# Altium PCB PCB1.PcbDoc
Units mil, origin at the board's own origin, x right, y up, seen from the top; angles counter-clockwise.
Board outline 3225 x 2370 mil, 2 copper layers (Top Layer, Bottom Layer); 84 components, 87 nets, 358 pads, 128 vias.
Unrouted connection lines stored in the file: 1.
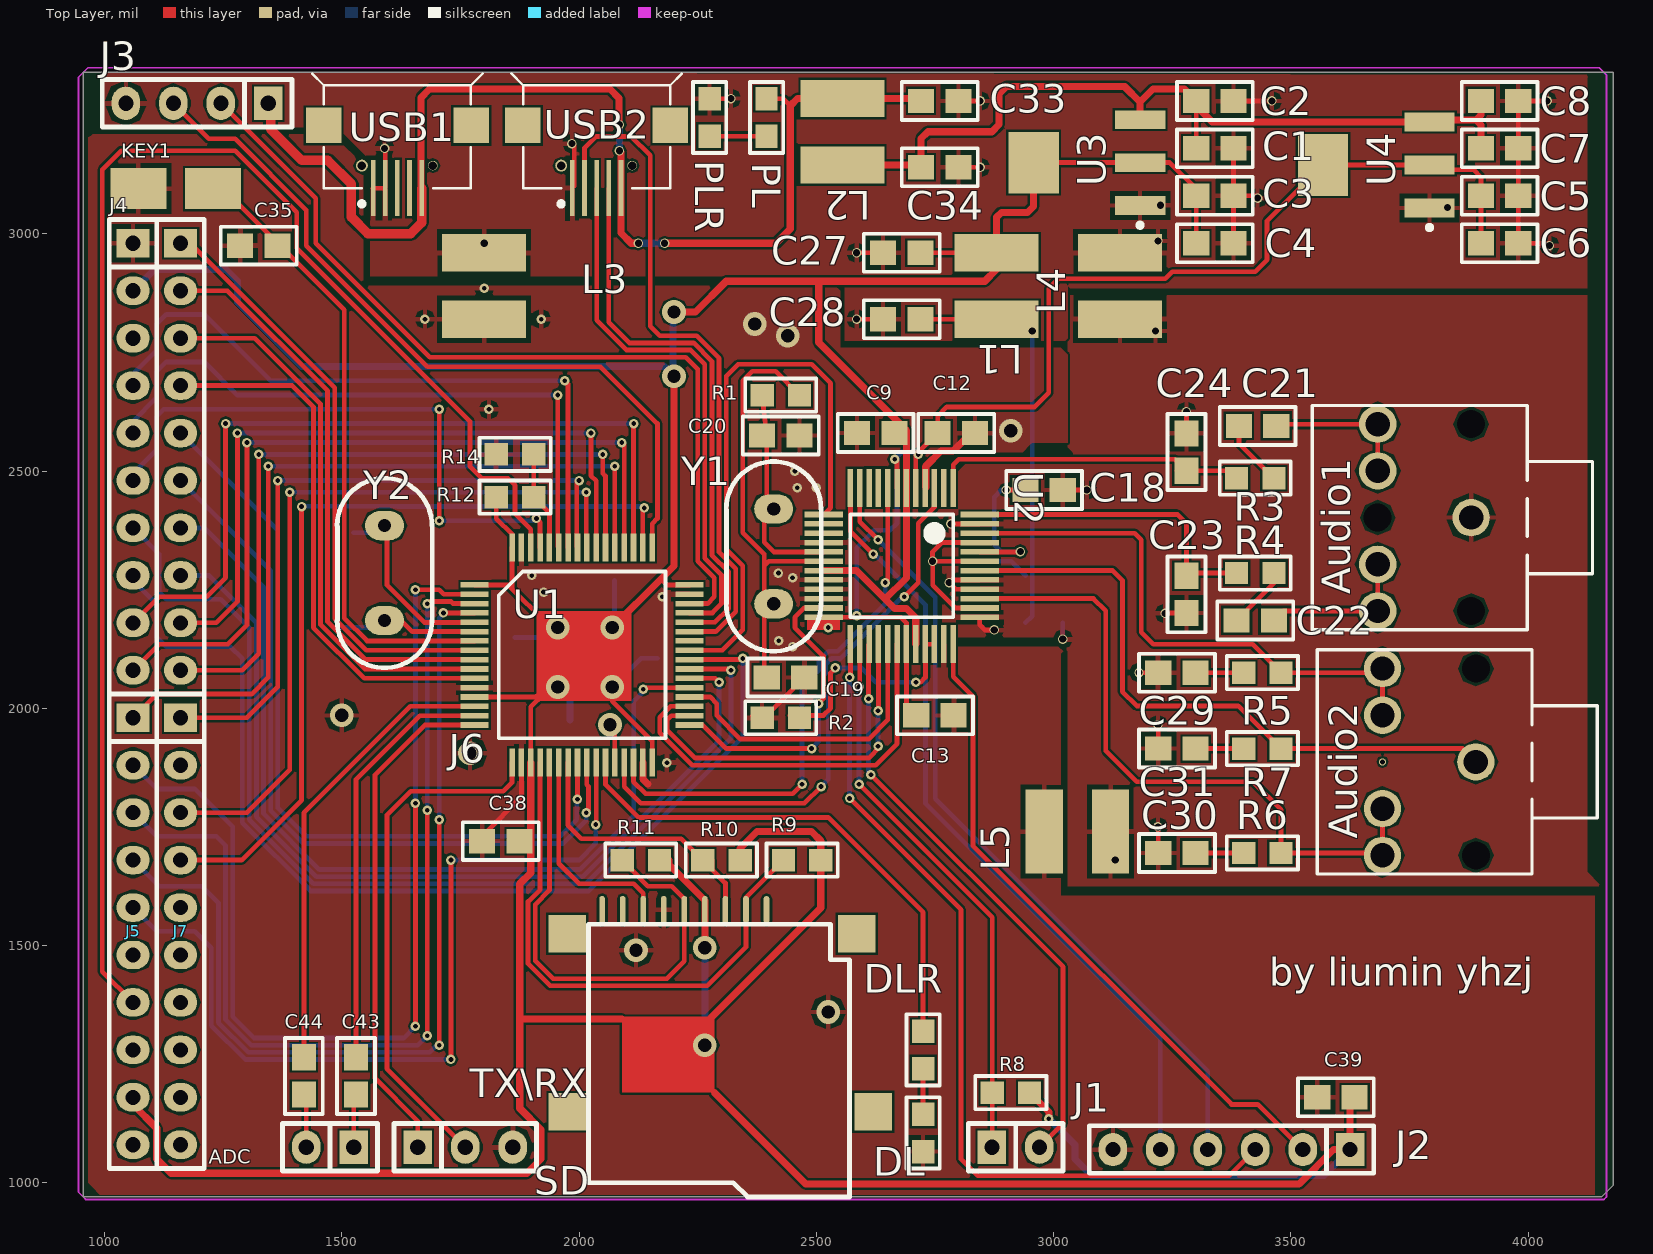
[diagram p0: Top Layer view]
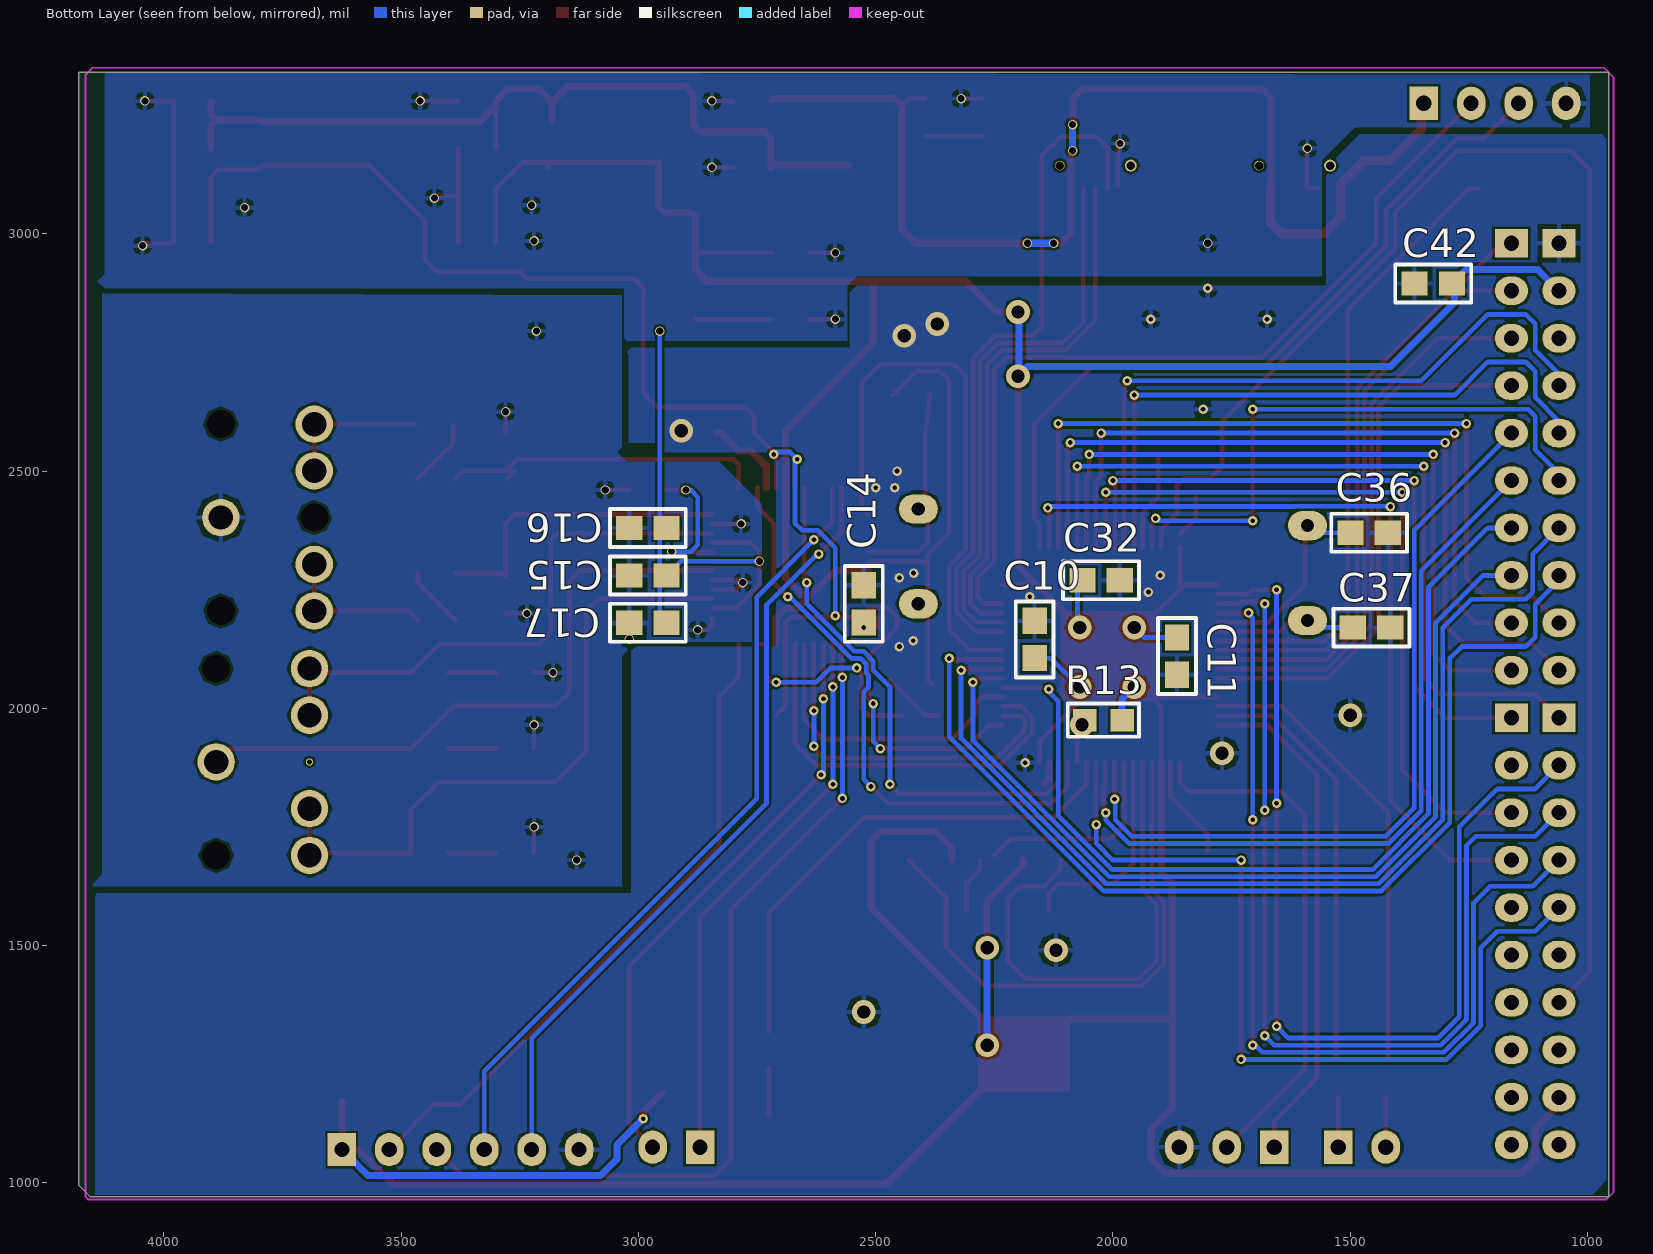
[diagram p1: Bottom Layer view, seen from below]

## Layer stack, top to bottom
Top Layer: signal copper 1.4
Dielectric: dielectric 12.6, FR-4, Dk 4.8
Bottom Layer: signal copper 1.4

## Board outline
955,3340 955,970 4155,970 4180,995 4180,3340 955,3340

## Design rules (kind name [scope] priority, off if disabled: settings)
Clearance [All] p1: gap=5
ComponentClearance [All] p1: gap=0 collisioncheckmode=3 verticalgap=10 showdistances=FALSE
PolygonConnect [All] p1: connectstyle=Relief reliefconductorwidth=10 reliefentries=4 polygonreliefangle="90 Angle"
RoutingVias [All] p1: holewidth=28 width=50 viastyle="Through Hole" minholewidth=28 minwidth=50 maxholewidth=28 maxwidth=50
SilkscreenOverComponentPads [IsPad] p1: minsilkscreentomaskgap=10
SolderMaskExpansion [All] p1: expansion=4
Width [All] p1: maxlimit=20 minlimit=10 preferedwidth=15 minimp=50.000000 maximp=50.000000 favimp=50.000000
26 further rules are at their usual default settings.

## Components (designator, comment, footprint, x,y, rotation, side; value= is the part's Value field where it differs from the comment)
ADC "CON2" SIP2 1475,1075 r180 top locked
Audio1 "Audio" AUDIO#1 3880,2205 r180 top
Audio2 "Audio" AUDIO#2 3890,1690 r180 top
C1 "106" 电容器 3340,3180 r180 top
C2 "106" 电容器 3340,3280 r180 top
C3 "106" 电容器 3340,3080 r180 top
C4 "106" 电容器 3340,2980 r180 top
C5 "106" 电容器 3940,3080 r180 top
C6 "106" 电容器 3940,2980 r180 top
C7 "106" 电容器 3940,3180 r180 top
C8 "106" 电容器 3940,3280 r180 top
C9 "104" 电容器 2625,2580 r0 top
C10 "104" 电容器 2165,2145 r270 bottom
C11 "104" 电容器 1865,2110 r90 bottom
C12 "104" 电容器 2795,2580 r180 top
C13 "104" 电容器 2750,1985 r180 top
C14 "104" 电容器 2525,2220 r270 bottom
C15 "104" 电容器 2980,2280 r180 bottom
C16 "104" 电容器 2980,2380 r180 bottom
C17 "104" 电容器 2980,2180 r180 bottom
C18 "104" 电容器 2980,2460 r0 top
C19 "22p" 电容器 2435,2065 r180 top
C20 "22p" 电容器 2425,2575 r180 top
C21 "1uf" 电容器 3430,2595 r180 top
C22 "1uf" 电容器 3425,2185 r180 top
C23 "22p" 电容器 3280,2240 r270 top
C24 "22p" 电容器 3280,2540 r90 top
C27 "106" 电容器 2680,2960 r180 top
C28 "106" 电容器 2680,2820 r180 top
C29 "10n" 电容器 3260,2075 r0 top
C30 "10n" 电容器 3260,1695 r0 top
C31 "10n" 电容器 3260,1915 r0 top
C32 "104" 电容器 2025,2270 r0 bottom
C33 "106" 电容器 2760,3280 r0 top
C34 "106" 电容器 2760,3140 r0 top
C35 "104" 电容器 1325,2975 r0 top
C36 "20p" 电容器 1460,2370 r180 bottom
C37 "20p" 电容器 1455,2170 r0 bottom
C38 "104" 电容器 1835,1720 r0 top
C39 "104" 电容器 3595,1180 r0 top
C42 "104" 电容器 1325,2895 r180 bottom
C43 "106" 电容器 1530,1225 r270 top
C44 "106" 电容器 1420,1225 r270 top
DL "R_0805" R_0805 2725,1105 r270 top
DLR "R_0805" R_0805 2725,1280 r270 top
J1 "CON2" SIP2 2920,1075 r0 top locked
J2 "CON6" SIP6 3625,1070 r180 top locked
J3 "CON4" SIP4 1195,3275 r180 top locked
J4 "CON10" sip10 1060,2980 r270 top locked
J5 "CON10" sip10 1060,1980 r270 top locked
J6 "CON10" sip10 1160,2980 r270 top locked
J7 "CON10" sip10 1160,1980 r270 top locked
KEY1 "KEY" KEY 1150,3095 r0 top
L1 "4.8u" L 2880,2960 r180 top
L2 "4.8u" L 2555,3285 r180 top
L3 "10uH" L 1800,2960 r180 top
L4 "10uH" L 3140,2960 r180 top
L5 "10uH" L 3120,1740 r90 top
PL "R_0805" R_0805 2395,3245 r270 top
PLR "R_0805" R_0805 2275,3245 r90 top
R1 "1M" R_0805 2425,2660 r0 top
R2 "100K" R_0805 2425,1980 r180 top
R3 "510" R_0805 3425,2485 r0 top
R4 "510" R_0805 3425,2285 r0 top
R5 "10" R_0805 3440,2075 r0 top
R6 "10" R_0805 3440,1695 r0 top
R7 "10" R_0805 3440,1915 r0 top
R8 "100k" R_0805 2910,1190 r0 top
R9 "10k" R_0805 2470,1680 r0 top
R10 "10k" R_0805 2300,1680 r0 top
R11 "10k" R_0805 2130,1680 r0 top
R12 "10K" R_0805 1865,2445 r0 top
R13 "10K" R_0805 2020,1975 r0 bottom
R14 "10K" R_0805 1865,2535 r0 top
SD "SD" TF卡座 2395,1575 r0 top locked
TX\RX "CON3" SIP3 1760,1075 r0 top locked
U1 "STM32f1 105 64" LQPF64_STM32 1780,2260 r0 top locked
U2 "vs1053" QFP48 2680,2300 r270 top locked
U3 "1117_3.3" SOT230P700X180-4N 3070,3150 r180 top
U4 "1117_1.8" SOT230P700X180-4N 3680,3145 r180 top
USB1 "usb" micro-USB 1600,3220 r90 top
USB2 "usb" micro-USB 2020,3220 r90 top
Y1 "Y1" XTAL 2410,2320 r90 top locked
Y2 "Y" XTAL 1590,2285 r90 top locked

## Footprints (in the part's own frame and the unit in brackets; to place one, negate y for a bottom-side part, rotate by r counter-clockwise, add the part's x,y. Pads: shape width x height; smd on the part's side, far side on the other; paste and mask are expansions set on the pad)
AUDIO#1 [mm]
  round 1 hole 1.5: 0(5,-5) 1(0,0) 2(0,-10)
  round 2 hole 1.3: 1S(0,-5) 2R(5,-10) 3N(5,-7.5) 4N(5,-2.5) 5T(5,0)
  silkscreen extent -6.5,-11 8.5,1, body extent -6.23,-11.05 8.77,1.15, height 11
AUDIO#2 [mm]
  round 0.381 hole 0.254: 0(5,-5)
  round 1 hole 1.5: 1(0,0) 2(0,-10)
  round 2 hole 1.3: 1S(0,-5) 2R(5,-10) 3N(5,-7.5) 4N(5,-2.5) 5T(5,0)
  silkscreen extent -6.5,-11 8.5,1, body extent -6.23,-11.05 8.77,1.15, height 11
KEY [mm]
  rect 3x2.2 smd: 1(-2,0) 2(2,0)
L [mm]
  rect 4.5x2 smd: 1(0,3.556) 2(0,0)
LQPF64_STM32 [mm]
  rect 1.5x0.3 smd: 1(0,0) 2(0,-0.5) 3(0,-1) 4(0,-1.5) 5(0,-2) 6(0,-2.5) 7(0,-3) 8(0,-3.5) 9(0,-4) 10(0,-4.5) 11(0,-5) 12(0,-5.5) 13(0,-6) 14(0,-6.5) 15(0,-7) 16(0,-7.5) 33(11.5,-7.5) 34(11.5,-7) 35(11.5,-6.5) 36(11.5,-6) 37(11.5,-5.5) 38(11.5,-5) 39(11.5,-4.5) 40(11.5,-4) 41(11.5,-3.5) 42(11.5,-3) 43(11.5,-2.5) 44(11.5,-2) 45(11.5,-1.5) 46(11.5,-1) 47(11.5,-0.5) 48(11.5,0)
  rect 0.3x1.5 smd: 17(2,-9.5) 18(2.5,-9.5) 19(3,-9.5) 20(3.5,-9.5) 21(4,-9.5) 22(4.5,-9.5) 23(5,-9.5) 24(5.5,-9.5) 25(6,-9.5) 26(6.5,-9.5) 27(7,-9.5) 28(7.5,-9.5) 29(8,-9.5) 30(8.5,-9.5) 31(9,-9.5) 32(9.5,-9.5) 49(9.5,2) 50(9,2) 51(8.5,2) 52(8,2) 53(7.5,2) 54(7,2) 55(6.5,2) 56(6,2) 57(5.5,2) 58(5,2) 59(4.5,2) 60(4,2) 61(3.5,2) 62(3,2) 63(2.5,2) 64(2,2)
  silkscreen extent 1.28,-8.21 10.21,0.72
micro-USB [mm]
  rect 3x0.25 smd: 1(-3.146,-1.732) 2(-3.146,-1.082) 3(-3.146,-0.432) 4(-3.146,0.218) 5(-3.146,0.868)
  round 0.635 hole 0.457 unplated: MH1(-1.938,1.468)
  round 0.508 hole 0.457 unplated: MH2(-1.938,-2.332)
  rect 1.9x1.9 smd: ""(0.212,3.518) ""(0.212,-4.382)
  silkscreen extent -4.11,-5 2.99,4.14, body extent -2.67,-4.83 2.93,3.97, height 2.74
QFP48 [mm]
  rect 2.05x0.3 smd: 1(-4.175,2.75) 2(-4.175,2.25) 3(-4.175,1.75) 4(-4.175,1.25) 5(-4.175,0.75) 6(-4.175,0.25) 7(-4.175,-0.25) 8(-4.175,-0.75) 9(-4.175,-1.25) 10(-4.175,-1.75) 11(-4.175,-2.25) 12(-4.175,-2.75) 25(4.175,-2.75) 26(4.175,-2.25) 27(4.175,-1.75) 28(4.175,-1.25) 29(4.175,-0.75) 30(4.175,-0.25) 31(4.175,0.25) 32(4.175,0.75) 33(4.175,1.25) 34(4.175,1.75) 35(4.175,2.25) 36(4.175,2.75)
  rect 0.3x2.05 smd: 13(-2.75,-4.175) 14(-2.25,-4.175) 15(-1.75,-4.175) 16(-1.25,-4.175) 17(-0.75,-4.175) 18(-0.25,-4.175) 19(0.25,-4.175) 20(0.75,-4.175) 21(1.25,-4.175) 22(1.75,-4.175) 23(2.25,-4.175) 24(2.75,-4.175) 37(2.75,4.175) 38(2.25,4.175) 39(1.75,4.175) 40(1.25,4.175) 41(0.75,4.175) 42(0.25,4.175) 43(-0.25,4.175) 44(-0.75,4.175) 45(-1.25,4.175) 46(-1.75,4.175) 47(-2.25,4.175) 48(-2.75,4.175)
  silkscreen extent -2.75,-2.75 2.75,2.75, body extent -3.5,-3.5 3.5,3.5, height 1.6
R_0805 [mm]
  rect 1.25x1.2 smd: 1(-1,0) 2(1,0)
  silkscreen extent -1.91,-0.89 1.91,0.89
SIP2 [mil]
  rect 60x70 hole 32: 1(-50,0)
  oval 60x70 hole 32: 2(50,0)
  silkscreen extent -100,-50 100,50
SIP3 [mil]
  rect 60x70 hole 32: 1(-100,0)
  oval 60x70 hole 32: 2(0,0) 3(100,0)
  silkscreen extent -150,-50 150,50
SIP4 [mil]
  rect 60x70 hole 32: 1(-150,0)
  oval 60x70 hole 32: 2(-50,0) 3(50,0) 4(150,0)
  silkscreen extent -200,-50 200,50
SIP6 [mil]
  rect 60x70 hole 32: 1(0,0)
  oval 60x70 hole 32: 2(100,0) 3(200,0) 4(300,0) 5(400,0) 6(500,0)
  silkscreen extent -50,-50 550,50
sip10 [mil]
  rect 60x70 hole 32: 1(0,0)
  oval 60x70 hole 32: 2(100,0) 3(200,0) 4(300,0) 5(400,0) 6(500,0) 7(600,0) 8(700,0) 9(800,0) 10(900,0)
  silkscreen extent -50,-50 950,50
SOT230P700X180-4N [mm] "SOT223, 4-Leads, Body 6.7x7.3mm (max), Pitch 2.30mm, IPC Medium Density"
  rect 2.7x1 smd: 1(-2.85,2.3) 2(-2.85,0) 3(-2.85,-2.3)
  rect 2.7x3.3 smd: 2(2.85,0)
  silkscreen extent -2.98,3.23 -2.73,3.47, body extent -1.85,-3.35 1.85,3.35, height 1.8
TF卡座 [mm]
  rect 2x2 smd: 0(-10.668,-10.795) 0(-10.668,-1.27) 0(4.826,-1.27) 0(5.715,-10.795)
  oval 0.3x1.5 smd: 1(0,0) 2(-1.1,0) 3(-2.2,0) 4(-3.3,0) 5(-4.4,0) 6(-5.5,0) 7(-6.6,0) 8(-7.7,0) 9(-8.8,0)
  silkscreen extent -9.53,-15.37 4.44,-0.76, body extent -10.79,-15.24 5.71,0.13, height 2
XTAL [mil]
  round 0 all layers, no hole: 0(0,0)
  oval 62x82 hole 28: 1(-100,0) 2(100,0)
  silkscreen extent -200,-100 200,100
电容器 [mm]
  rect 1.4x1.3 smd: 1(-1,0) 2(1,0)
  silkscreen extent -2.03,-1.02 2.03,1.02

## Part data
C1 C2 C3 C4 C5 C6 C7 C8 C9 C10 C11 C12 C13 C14 C15 C16 C17 C18 C19 C20 C21 C22 C23 C24 C27 C28 C29 C30 C31 C32 C33 C34 C35 C36 C37 C38 C39 C42 C43 C44: library part cpp
L1 L2 L3 L4 L5: library part L
R1 R2 R3 R4 R5 R6 R7 R8 R9 R10 R11 R12 R13 R14: library part R_0805
SD: library part TF卡座
U1: library part "STM32f1 103 64"
U3 U4: library part 1117
USB1 USB2: library part CON4
Y1 Y2: library part XTAL, "Crystal Oscillator"

## Via types
v1: diameter 20, hole 10, Top Layer to Bottom Layer, 68 vias
v2: diameter 20, hole 15, Top Layer to Bottom Layer, 35 vias
v3: diameter 50, hole 28, Top Layer to Bottom Layer, 16 vias
v4: diameter 20, hole 10, Top Layer to Bottom Layer, tented bottom, 9 vias

## Nets (pads, with @x,y where several pads share a name; then routed paths per layer and width w, separated by ;. In a path a pad name is that pad's centre, name@x,y a point inside that pad or via, vN(x,y) a via of type N, cw(c..) or ccw(c..) an arc to the next point about the centre after c; other vN are vias at no path point)
1.8V: C5.2 C6.2 C12.2 C13.2 C14.2 U2.5 U2.7 U2.24 U2.31 U4.2 | length 2747.9
  Top Layer w10: U2.24 2678.27,2191.73 2689.84,2180.16 U2.31 2689.84,2005.79 C13.2 ; v1(2665.08,2524.92) 2670.16,2519.84 U2.7 ; U2.5 2709.53,2533.9 C12.2 2755.63,2615.63 2775,2635 2960,2635 2990,2665 2990,2885 3010,2905 3235,2905 3250,2920 3425,2920 3450,2945 3450,3027.2 3567.8,3145 3792.2,3145 3802.2,3135 3885,3135 3900.63,3119.37 C5.2 C6.2
  Bottom Layer w10: v1(2585,2195) 2585,2338.28 2621.72,2375 2655,2375 2670,2390 2670,2529.84 2680.16,2540 2710,2540 v1(2715,2535)
  other v1: 2525,2170
3.3V: C3.2 C4.2 C9.2 C10.2 C11.2 C27.1 C32.2 C38.2 C39.2 C42.2 J2.1 J4.2 J5.9 L1.2 R8.2 R9.2 R10.2 R11.2 R12.1 R13.1 SD.4 U1.1 U1.13 U1.19 U1.32 U1.48 U1.64 U2.6 U2.14 U2.19 U2.32 U3.2 | length 11709.5
  Top Layer w10: J5.9@1060,1165 J5.9 ; U1.13 1908.78,2023.78 1915,2030 ; U1.1 1850,2260 1858.74,2251.26 ; R12.1 1825.63,2399.37 U1.64@1858.74,2366.26 ; U1.64 1858.74,2251.26 ; U1.19 1898.11,2003.11 1925,2030 ; 1925,2180 1925,2185 1858.74,2251.26 ; v3@2070,2055 v3(2070,2045) 2070,2015 2154.02,1930.98 U1.32 ; 2172.5,2272.5 2185,2260 U1.48 ; C27.1 L1.2 ; U3.2@2957.8,3150 U3.2@3182.2,3150 ; U3.2@3192.83,3139.37 U3.2@3182.2,3150 ; C4.2 C3.2 3300.63,3094.37 3245,3150 U3.2@3182.2,3150
  Top Layer w15: J5.9@1060,1165 1110,1115 1110,1050 1140,1020 1890,1020 1920,1050 1920,1112.12 1875,1157.12 1875,1630 1898.11,1653.11 U1.19 ; 1875,1345 2090,1345 ; 2000,2100 v3(2070,2170) 2172.5,2272.5 2200,2300 v3(2200,2700) ; R11.2@2189.37,1680 2189.37,1670.63 2265.08,1594.92 SD.4 v3@2265.08,1510.08 ; v3(2200,2835) 2245,2835 2310,2900 2505,2900 ; 2225,1295 2509.37,1579.37 R9.2 2509.37,1720.63 2490,1740 2375,1740 2339.37,1704.37 R10.2 ; 2285,1190 2477.5,997.5 3517.6,997.5 3590.1,1070 J2.1 C39.2@3625,1170.63 ; U2.19 2584.84,2290.16 2645,2230 ; U2.32 2709.53,2190.47 2690,2210 2665,2210 2645,2230 ; R8.2 2990,1149.37 v1(2990,1135) ; U3.2@2957.8,3150 2957.8,3057.8 2945,3045 2890,3045 2880,3035 L1.2 2880,2925 2855,2900 2505,2900 ; 2505,2900 2505,2770.63 2689.84,2585.79 U2.6 2689.84,2274.84 2645,2230
  Bottom Layer w10: C11.2 1934.37,2149.37 v3(1955,2170) ; v3(2070,2045) 2130.63,2105.63 C10.2 ; v3@2074.37,2174.37 C32.2@2074.37,2270
  Bottom Layer w15: J4.2 1105,2925 1255.63,2925 1280,2900.63 1280,2855 1415,2720 2180,2720 v3@2197.5,2702.5 ; v3(1955,2045) 1980.63,2019.37 R13.1 ; v3(2200,2700) v3@2197.5,2702.5 ; v3(2200,2835) 2197.5,2832.5 v3@2197.5,2702.5 ; v3(2265,1290) v3(2265,1495) ; v1(2990,1135) 3045,1080 3045,1050 3080,1015 3570,1015 J2.1
5V: C33.1 J3.1 L2.2 PL.1 USB1.1 USB2.1 | length 2478.3
  Top Layer w10: USB1.1@1664.3,3100.03 1666.8,3097.53 USB1.1 ; PL.1 2430.63,3284.37 2445,3270 ; C33.1@2715.63,3285 C33.1
  Top Layer w15: USB1.1@1666.8,3097.53 1666.8,3286.8 1685,3305 2065,3305 2084.3,3285.7 v2@2084.3,3230.7 ; v2(2085,3175) 2088.18,3171.82 USB2.1 2088.18,3001.82 2110,2980 v2(2125,2980) ; v2(2180,2980) 2415,2980 2445,3010 2445,3270 2460,3285 L2.2 C33.1@2715.63,3285
  Top Layer w20: J3.1@1350,3275 1350,3220 1415,3155 1470,3155 1520,3105 1520,3035 1555,3000 1645,3000 1668.18,3023.18 USB1.1
  Bottom Layer w15: v2(2085,3175) v2(2085,3230) ; v2(2125,2980) v2(2180,2980)
5V_IN: C1.2 C2.2 C7.2 C8.2 C34.1 L2.1 U3.3 U4.3 | length 1777.9
  Top Layer w10: C34.1@2715.63,3145 C34.1 ; C1.2 3300.63,3269.37 C2.2 ; U4.3 U4.3@3796.65,3240
  Top Layer w15: L2.1 C34.1@2715.63,3145 ; C34.1 2720.63,3200.63 2735,3215 2870,3215 2885,3230 2885,3295 2900,3310 3150,3310 3182.2,3277.8 ; U3.3 3182.2,3277.8 ; C2.2@3300.63,3269.37 3334.45,3235.55 U4.3 ; C2.2 3275.63,3305 3209.41,3305 3182.2,3277.8 ; U4.3@3796.65,3240 3890,3240 ; C7.2 3900.63,3229.37 3890,3240 ; C8.2 3900.63,3250.63 3890,3240
ADC1: C44.1 U1.14 | length 968.5
  Top Layer w10: C44.1 1420,1780 1644.09,2004.09 U1.14
ADC2: C43.1 U1.15 | length 886.3
  Top Layer w10: C43.1@1530,1269.37 1530,1850 1664.41,1984.41 U1.15
AGND: Audio1.1S C15.1 C16.1 C17.1 C18.2 C23.2 C24.2 C29.1 C30.1 C31.1 L4.1 L5.2 U2.37 U2.40 U2.41 U2.47 | length 570.9
  Top Layer w10: v2(2783.58,2388.58) U2.47 ; U2.37 2844.37,2175.63 2855,2165 v2(2875,2165) ; U2.40 2794.21,2250.79 v2(2780,2265) 2785.47,2270.47 U2.41 ; C18.2 v2(3070,2460) ; v2(3180,2075) C29.1 ; v2(3220,1750) 3220.63,1749.37 C30.1 ; v2(3220,1965) 3220.63,1964.37 C31.1 ; v2(3235,2200) 3235.63,2200.63 C23.2 ; C24.2 v2(3280,2625)
  Bottom Layer w10: v2(3019.37,2145.63) C17.1
  other v2: 3130,1680 3215,2795
AVDD: C15.2 C16.2 C17.2 C28.1 L1.1 U2.38 U2.43 U2.45 | length 1385.7
  Top Layer w10: C28.1 L1.1 ; U2.38 2793.23,2211.42 2745.16,2259.49 v2(2745.16,2309.84) ; U2.43 v2(2745.16,2309.84) ; U2.45 2764.21,2349.21 2745,2330 2745,2310 v2(2745.16,2309.84)
  Bottom Layer w10: v2(2745.16,2309.84) 2910.79,2309.84 C15.2 ; C17.2 2955,2194.37 v2(2955,2795)
BOOT0: R12.2 R14.2 U1.60 | length 210
  Top Layer w10: R14.2 R12.2 1937.48,2411.89 U1.60
BOOT1: R13.2 U1.28 | length 83.3
  Top Layer w10: v3(2065,1965) 2075.28,1954.72 U1.28
CLK: R11.1 SD.5 U1.21 | length 1064.5
  Top Layer w10: U1.21 1937.48,1616.27 1907.5,1586.29 1907.5,1467.5 1945,1430 2185,1430 2221.77,1466.77 SD.5 2221.77,1598.23 2195,1625 2145,1625 2110.63,1659.37 R11.1@2110.63,1680
CS: R9.1 SD.2 U1.20 | length 1163.4
  Top Layer w10: U1.20 1917.8,1617.8 1892.5,1592.5 1892.5,1461.29 1938.79,1415 2270,1415 2351.69,1496.69 SD.2 2351.69,1601.06 R9.1
DAT_LED: DLR.1 U1.27 | length 1078.2
  Top Layer w10: U1.27 2055.59,1839.41 2125,1770 2525,1770 2725,1570 DLR.1
DB0: J6.1 U1.8 | length 1260
  Top Layer w10: J6.1 1180,2980 1485,2675 1485,2188.79 1551.27,2122.52 1717.8,2122.52 ; 1717.8,2122.2 U1.8
DB1: J6.2 U1.9 | length 1226.9
  Top Layer w10: J6.2 1258.79,2880 1470,2668.79 1470,2182.57 1550.05,2102.52 U1.9
DB2: J6.3 U1.10 | length 1181.1
  Top Layer w10: J6.3 1316.21,2780 1455,2641.21 1455,2176.36 1548.53,2082.84 U1.10
DB3: J6.4 U1.11 | length 1147.8
  Top Layer w10: J6.4 1395,2680 1440,2635 1440,2170.15 1547,2063.15 U1.11
DB4: J6.5 U1.24 | length 1668.8
  Top Layer w10: v4(1996.54,1808.46) U1.24
  Bottom Layer w10: J6.5 1365,2375 1365,1790 1425,1730 1960,1730 1995,1765 1995,1800 2000,1805 v4(1996.54,1808.46)
DB5: J6.6 U1.25 | length 1614.4
  Top Layer w10: v4(2015,1780) 2020,1785 2020,1835 2016.22,1838.78 U1.25
  Bottom Layer w10: J6.6 1350,2290 1350,1783.79 1418.79,1715 1966.21,1715 2015,1763.79 v4(2015,1780)
DB6: J6.7 U1.37 | length 1943.8
  Top Layer w10: v1@2138.47,2043.46 U1.37
  Bottom Layer w10: J6.7 1210,2380 1335,2255 1335,1777.57 1452.57,1660 2001.21,1660 2115,1773.79 2115,2015 v1@2135,2035
  other v1: 2135,2040
DB7: J6.8 U1.38 | length 1944.6
  Top Layer w10: U1.38 2286.85,2063.15 v1(2295,2055)
  Bottom Layer w10: J6.8 1220,2280 1320,2180 1320,1771.36 1446.36,1645 2007.43,1645 2295,1932.57 v1(2295,2055)
DB8: J4.7 U1.39 | length 2213.6
  Top Layer w10: U1.39 2317.16,2082.84 v1(2320,2080)
  Bottom Layer w10: J4.7 1115,2325 1115,2245 1130,2230 1245,2230 1305,2170 1305,1765.15 1440.15,1630 2013.64,1630 2320,1936.36 v1(2320,2080)
DB9: J4.8 U1.40 | length 2222.8
  Top Layer w10: U1.40 2342.52,2102.52 v1(2345,2105)
  Bottom Layer w10: J4.8 1060,2268.79 1110,2218.79 1110,2150 1130,2130 1265,2130 1290,2105 1290,1758.93 1433.93,1615 2019.85,1615 2345,1940.15 v1(2345,2105)
DB10: J4.9 U1.51 | length 1665.3
  Top Layer w10: J4.9 1115,2235 1215,2235 1255,2275 v1@1255,2595 ; U1.51 2114.65,2589.65
  Bottom Layer w10: v1(1255,2600) v1(2115,2600)
DB11: J4.10 U1.52 | length 1672.7
  Top Layer w10: J4.10 1115,2135 1260,2135 1300,2175 v1@1300,2555 ; v1(2090,2560) 2095,2555 2095,2338.78 U1.52
  Bottom Layer w10: v1(1300,2560) v1(2090,2560)
DB12: J5.1 U1.53 | length 1666.6
  Top Layer w10: J5.1 1110,2030 1310,2030 1345,2065 v1(1345,2510) ; v1(2075,2510) 2075,2339.02 U1.53
  Bottom Layer w10: v1(1345,2510) v1(2075,2510)
DB13: J5.2 U1.2 | length 2126.9
  Top Layer w10: v1(1655,1330) v4(1655,1800) ; v1(1655,2250) 1705,2250 1714.68,2240.32 U1.2
  Bottom Layer w10: J5.2 1110,1830 1190,1830 1270,1750 1270,1350 1315,1305 1630,1305 v1(1655,1330) ; v4(1655,1800) v1(1655,2250)
DB14: J5.3 U1.3 | length 2059.7
  Top Layer w10: v4(1680,1310) v4(1680,1785) ; v1(1680,2220) 1685,2225 1730,2225 1734.37,2220.63 U1.3
  Bottom Layer w10: J5.3 1110,1730 1235,1730 1255,1710 1255,1343.79 1308.79,1290 1660,1290 v4(1680,1310) ; v4@1680,1790 v1(1680,2220) v1@1680,2225
DB15: J5.4 U1.4 | length 1952.7
  Top Layer w10: v4(1705,1290) v4(1705,1765) ; v1@1710,2205 v1(1714.06,2200.95) U1.4
  Bottom Layer w10: J5.4 1115,1625 1205,1625 1240,1590 1240,1337.57 1302.57,1275 1685,1275 1700,1290 v4(1705,1290) ; v4(1705,1765) 1705,2190 v1@1715,2200
DGND: C9.1 C10.1 C11.1 C12.1 C13.1 C14.1 C19.1 C20.1 C32.1 C35.1 C36.2 C37.1 C38.1 C39.1 C42.1 DL.2 J2.6 J4.1 KEY1.1 L3.1 L5.1 R2.2 R14.1 SD.6 TX\RX.3 U1.12 U1.18 U1.31 U1.47 U1.63 U2.4 U2.16 U2.20 U2.21 U2.22 U2.35 | length 581.5
  Top Layer w10: C38.1@1800,1700 1800,1735 1878.43,1813.43 U1.18 ; R2.2@2365.63,1985 2395,1985 C19.1@2470,2060
  Top Layer w15: U1.31 2134.33,1850.67 2145,1840 ; U2.4@2730.49,2465.65 2730.49,2509.9 2762.5,2541.91 2788.37,2541.91 2826.46,2580 C12.1
  other v1: 2185,1885 2450,2130 2420.82,2142.35 2175,2235 1925,2245 2450,2275 1900,2280 2420,2285 2460,2465 2500,2465 2455,2500 1810,2630 1675,2820 1920,2820 1800,2885
  other v3: 2525,1360 2120,1490 1770,1905 1500,1985 2910,2585 2440,2785 2370,2810
LRCK: J2.2 U2.36 | length 1403
  Top Layer w10: U2.36 2788.27,2066.73 2830,2025 2830,1710 3375,1165 3430,1165 J2.2
MCLK: J2.3 U2.25 | length 1835.2
  Top Layer w10: v1(2570,1810) 2805,1575 2805,1050 2840,1015 3370,1015 J2.3 ; v1@2571.73,2065 U2.25
  Bottom Layer w10: v1@2570,1815 v1(2570,2065)
MISO: SD.7 U1.22 | length 452.1
  Top Layer w10: U1.22 1957.17,1672.83 2000,1630 2115,1630 2135.16,1609.84 SD.7
MOSI: R10.1 SD.3 U1.23 | length 548.9
  Top Layer w10: U1.23 1976.54,1885.67 1976.54,1753.46 2005,1725 2215,1725 R10.1@2250,1690 ; R10.1@2280.63,1680 2280.63,1659.37 2308.39,1631.61 SD.3
NetADC_1: ADC.1 C43.2 | length 110.6
  Top Layer w10: ADC.1@1525,1070 C43.2@1525,1180.63
NetADC_2: ADC.2 C44.2 | length 110.6
  Top Layer w10: ADC.2@1425,1070 C44.2@1425,1180.63
NetAudio1_2R: Audio1.2R Audio1.3N C21.1 | length 308.5
  Top Layer w10: C21.1@3473.07,2598.7 Audio1.2R Audio1.3N
NetAudio1_4N: Audio1.4N Audio1.5T C22.1 | length 325.5
  Top Layer w10: C22.1 3484.37,2205 Audio1.5T Audio1.4N
NetAudio2_1S: Audio2.1S R7.2 U2.42 | length 1350.3
  Top Layer w10: U2.42 3124.84,2290.16 3145,2270 3145,2035 3175,2005 3389.37,2005 R7.2 3861.85,1915 Audio2.1S
NetAudio2_2R: Audio2.2R Audio2.3N R5.2 U2.46 | length 1174.5
  Top Layer w10: U2.46 3171.1,2368.9 3185,2355 3185,2160 3210,2135 3419.37,2135 R5.2 Audio2.2R@3684.45,2075 ; Audio2.3N Audio2.2R
NetAudio2_4N: Audio2.4N Audio2.5T R6.2 U2.39 | length 1397.2
  Top Layer w10: U2.39 3083.9,2231.1 3110,2205 3110,1910 3175,1845 3420,1845 3479.37,1785.63 R6.2 3688.15,1695 Audio2.5T Audio2.4N
NetC18_1: C18.1 U2.44 | length 318.9
  Top Layer w10: U2.44 2929.53,2329.53 v2(2930,2330) ; v2(2900,2460) C18.1
  Bottom Layer w10: v2(2900,2460) 2890,2460 2875,2445 2875,2345 2890,2330 v2(2930,2330)
NetC19_2: C19.2 R1.2 U2.18 Y1.1 | length 940.4
  Top Layer w10: C19.2@2380.32,2050.32 2390,2060 2390,2325 2345,2370 2345,2690 2365,2710 2414.37,2710 R1.2 ; 2390,2300 2399.84,2309.84 U2.18
NetC20_2: C20.2 R1.1 U2.17 Y1.2 | length 440.3
  Top Layer w10: R1.1 2395.63,2575 Y1.2@2395.63,2429.37 ; Y1.2@2390,2425 2390,2350 2410.47,2329.53 U2.17
NetC21_2: C21.2 R3.2 | length 140.5
  Top Layer w10: C21.2 3390.63,2558.74 R3.2
NetC22_2: C22.2 R4.2 | length 132.6
  Top Layer w10: C22.2 3464.37,2263.74 R4.2
NetC23_1: C23.1 R4.1 U2.48 | length 661.8
  Top Layer w10: U2.48 3261.73,2408.27 3280,2390 C23.1 3285.63,2285 R4.1
NetC24_1: C24.1 R3.1 U2.1 | length 700.4
  Top Layer w10: U2.1 2788.27,2513.27 2800,2525 3255.63,2525 C24.1 ; C24.1@3260,2500.63 C24.1@3275.63,2485 ; C24.1@3269.37,2500.63 C24.1 ; R3.1 3370,2500.63 C24.1
NetC29_2: C29.2 R5.1 | length 101.3
  Top Layer w10: C29.2 R5.1
NetC30_2: C30.2 R6.1 | length 101.3
  Top Layer w10: C30.2 R6.1
NetC31_2: C31.2 R7.1 | length 101.3
  Top Layer w10: C31.2 R7.1
NetDL_1: DL.1 DLR.2 | length 96.3
  Top Layer w10: DL.1 DLR.2
NetPL_2: PL.2 PLR.1 | length 120
  Top Layer w10: PLR.1 PL.2
NetR2_1: R2.1 U2.33 U2.34 | length 475.5
  Top Layer w10: R2.1@2444.37,1985 2515,1985 2530,2000 2530,2075 v1(2540,2085) ; v1(2710,2055) 2720,2055 2730,2065 2730,2134.84 U2.34@2748.11,2134.84
  Bottom Layer w10: v1(2540,2085) 2595,2085 2625,2055 v1(2710,2055)
NRST: C35.2 KEY1.2 U1.7 | length 1326.8
  Top Layer w10: KEY1.2 1250,3095 1505,2840 1505,2190 1553.11,2141.89 U1.7
OTG_DM: U1.44 USB2.2 | length 1163.9
  Top Layer w10: USB2.2 2062.59,2813.62 2106.21,2770 2241.21,2770 2280,2731.21 2280,2322.43 2315,2287.43 2315,2210 2286.26,2181.26 U1.44
OTG_DP: U1.45 USB2.3 | length 1139.3
  Top Layer w10: USB2.3 2037,2818 2100,2755 2235,2755 2265,2725 2265,2316.21 2300,2281.21 2300,2220 2280.95,2200.95 U1.45
OTG_ID: U1.43 USB2.4 | length 1446
  Top Layer w10: USB2.4 2011.41,3181.41 2035,3205 2110,3205 2150,3165 2150,2805 2170,2785 2247.43,2785 2295,2737.43 2295,2328.64 2330,2293.64 2330,2203.79 2287.79,2161.57 U1.43
OTG_VBUS: U1.42
P_CS: J5.5 U1.26 | length 1803
  Top Layer w10: v4(1730,1260) v4(1730,1680) ; v1(2035,1755) v1@2035,1760 ; v1@2035.91,1760.91 U1.26
  Bottom Layer w10: J5.5 1110,1530 1190,1530 1225,1495 1225,1331.36 1296.36,1260 v4@1725,1260 ; v4(1730,1680) 2000,1680 2035,1715 v1@2035,1750 ; v1(2035,1755) v1@2035,1760
P_RD: J4.6 U1.61 | length 1263.5
  Top Layer w10: v1(1705,2395) v1(1705,2630) ; v1(1910,2400) 1917.8,2392.2 U1.61
  Bottom Layer w10: J4.6 1060,2495 1110,2545 1110,2615 1125,2630 v1(1705,2630) ; v1(1705,2395) 1905,2395 v1(1910,2400)
P_REST: J5.7 U1.62 | length 3205.6
  Top Layer w10: J5.7 995,1445 995,3135.24 1035,3175.24 1035,3175 1275,3175 1405,3045 1405,2970 1770,2605 1770,2510 1795,2485 1850,2485 1865,2470 1865,2410 1898.11,2376.89 U1.62
P_RS: J4.4 U1.58 | length 1431.1
  Top Layer w10: v1(1970,2690) 1976.85,2683.15 U1.58
  Bottom Layer w10: J4.4 1060,2705 1110,2755 1110,2810 1130,2830 1210,2830 1350,2690 v1(1970,2690)
P_WR: J4.5 U1.59 | length 1370.1
  Top Layer w10: v1(1955,2660) 1955,2665 1955,2340.91 U1.59
  Bottom Layer w10: J4.5 1060,2605 1110,2655 1110,2710 1130,2730 1210,2730 1280,2660 v1(1955,2660) v1@1955,2665
PGND: C1.1 C2.1 C3.1 C4.1 C5.1 C6.1 C7.1 C8.1 C27.2 C28.2 C33.2 C34.2 J3.4 L3.2 L4.2 PLR.2 U3.1 U4.1 USB1.4 USB1.5 USB2.5 | length 1197.2
  Top Layer w10: USB1.5 USB1.4 1591.41,3178.59 v2(1590,3180) ; v2(1985,3190) 1989.7,3185.3 USB2.5@1989.7,3100.03 ; PLR.2 2319.37,3284.37 v2(2320,3285) ; v2(2585,2820) C28.2 ; v2(2585,2960) C27.2 ; C34.2 v2(2845,3140) ; C33.2 v2(2845,3280) ; C4.1 C3.1 ; C1.1 C3.1 ; C2.1 v2(3460,3280) ; v2@3425,3080 C3.1 ; v2@4040,2980 C6.1 C5.1 C7.1 C8.1 v2(4040,3280)
  other v2: 4045,2975 1800,2980 3220,2985 3830,3055 3225,3060 3430,3075
RX: J1.1 R8.1 U2.26 | length 1182.1
  Top Layer w10: v1(2590,1840) 2870.63,1559.37 R8.1 2870.63,1075.63 J1.1 ; v1@2591.42,2045 U2.26
  Bottom Layer w10: v1@2590,1835 v1(2590,1840) v1(2590,2045)
SCLK: J2.4 U2.11 | length 1698.2
  Top Layer w10: U2.11 2591.42,2393.58 v1(2630,2355)
  Bottom Layer w10: v1(2630,2355) 2750.61,2234.39 2750.61,1809.39 3325,1235 J2.4
SDIN: J2.5 U2.12 | length 1666.9
  Top Layer w10: U2.12 2571.73,2373.27 v1(2620,2325)
  Bottom Layer w10: v1(2620,2325) 2623.28,2325 2730,2218.28 2730,1800 3225,1305 J2.5
STM_RX: TX\RX.2 U1.17 | length 1102.8
  Top Layer w10: TX\RX.2 1595,1240 1595,1775 1645,1825 1840,1825 1858.74,1843.74 U1.17
STM_TX: TX\RX.1 U1.16 | length 1075.7
  Top Layer w10: TX\RX.1 1660,1130 1570,1220 1570,1860 1674.72,1964.72 U1.16
SWCLK: J3.2 U1.46 | length 1845.3
  Top Layer w10: J3.2 1445,3075 1445,2980 1685,2740 2225,2740 2250,2715 2250,2310 2285,2275 2285,2235 2270.63,2220.63 U1.46
SWDIO: J3.3 U1.49 | length 1609.3
  Top Layer w10: J3.3 1220,3200 1275,3200 1425,3050 1425,2975 1680,2720 2045,2720 2165,2600 2165,2400 2154.02,2389.02 U1.49
T_CLK: J6.9 U1.55 | length 1479.4
  Top Layer w10: J6.9 1235,2180 1280,2225 v1(1280,2580) ; v1(2025,2580) 2025,2490 2035.91,2479.09 U1.55
  Bottom Layer w10: v1(1280,2580) v1@2020,2580
T_CS: J6.10 U1.54 | length 1518.1
  Top Layer w10: J6.10 1290,2080 1325,2115 v1@1325,2530 ; v1(2050,2535) 2050,2495 2055.59,2489.41 U1.54
  Bottom Layer w10: v1(1325,2535) v1(2050,2535)
T_DIN: J7.1 U1.57 | length 1438.8
  Top Layer w10: J7.1 1300,1980 1365,2045 v1(1365,2480) ; v1@1995,2480 1995,2340.28 U1.57
  Bottom Layer w10: v1(1365,2480) v1@1995,2480
  other v1: 2000,2480
T_DO: J7.3 U1.56 | length 1594
  Top Layer w10: J7.3 1300,1780 1390,1870 v1(1390,2455) ; v1(2015,2455) 2015,2339.96 U1.56
  Bottom Layer w10: v1(1390,2455) v1(2015,2455)
T_IRQ: J7.4 U1.50 | length 1740.5
  Top Layer w10: J7.4 1288.79,1680 1415,1806.21 v1(1415,2425) ; U1.50 2134.33,2419.33 v1(2137.17,2422.17)
  Bottom Layer w10: v1(1415,2425) 1416,2426 1616.98,2426 1617.98,2425 2140,2425 v1(2137.17,2422.17)
TX: J1.2 U2.27 | length 1249.6
  Top Layer w10: v1(2610,2020) 2610,2134.53 U2.27 ; v1(2615,1860) 3020,1455 3020,1125 J1.2
  Bottom Layer w10: v1@2610,1860 v1(2610,2020)
VS_DREQ: U1.30 U2.8 | length 1125.3
  Top Layer w10: U1.30 2114.65,1845.35 2140,1820 2450,1820 v1(2470,1840) ; v1(2645,2265) 2650.47,2270.47 U2.8
  Bottom Layer w10: v1(2470,1840) 2470,2045 2505,2080 2505,2099.5 2525.5,2120 2545,2120 2645,2220 v1(2645,2265)
VS_MISO: U1.35 U2.30 | length 862.5
  Top Layer w10: U1.35 2192.88,2004.1 2170,1981.21 2170,1948.79 2238.79,1880 2625,1880 2670.16,1925.16 U2.30
VS_MOSI: U1.36 U2.29 | length 646.1
  Top Layer w10: U1.36 2276.22,2023.78 2290,2010 2290,1985 2340,1935 2610,1935 2650.47,1975.47 U2.29
VS_RST: U1.29 U2.3 | length 1245.4
  Top Layer w10: U1.29 2094.96,1835.04 2130,1800 2475,1800 v1(2510,1835) ; v1(2685,2235) 2715,2265 2715,2390 2739.02,2414.02 2739.26,2414.02 2748.9,2423.65 U2.3
  Bottom Layer w10: v1(2510,1835) 2525,1850 2525,2035 2515,2045 2515,2068.79 2520,2073.79 2520,2093.28 2531.72,2105 2551.21,2105 2681.21,2235 v1(2685,2235)
VS_SCK: U1.34 U2.28 | length 776.7
  Top Layer w10: U1.34 2194.41,1984.41 2185,1975 2185,1955 2245,1895 2610,1895 2635,1920 v1(2630,1920) ; v1@2630.79,1995.79 U2.28
  Bottom Layer w10: v1(2630,1920) v1(2630,1995)
VS_XCS: U1.33 U2.23 | length 658.4
  Top Layer w10: U1.33 2260.28,1964.72 2310,1915 v1(2490,1915) ; v1(2505,2010) 2515,2020 2515,2110 2455,2170 2455,2191.5 2474.91,2211.42 U2.23
  Bottom Layer w10: v1(2490,1915) 2505,1930 v1(2505,2010)
VS_XDCS: U1.41 U2.13 | length 1209.1
  Top Layer w10: U1.41 2302.2,2122.2 2345,2165 2345,2299.85 2310,2334.85 2310,2700 2335,2725 2490,2725 2530,2685 2530,2422.64 U2.13
XL1: C36.1 U1.5 Y2.2 | length 428.9
  Top Layer w10: Y2.2@1620,2390 1595,2365 1595,2260 1674.06,2180.95 1779.68,2180.95 U1.5
  Bottom Layer w10: C36.1@1524.37,2370 Y2.2@1595,2370
XL2: C37.2 U1.6 Y2.1 | length 257.4
  Top Layer w10: Y2.1@1620,2190 1648.43,2161.57 U1.6
  Bottom Layer w10: C37.2 Y2.1@1580,2170
pads on no net: Audio1.0 Audio1.1 Audio1.2 Audio2.0 Audio2.1 Audio2.2 J4.3 J5.6 J5.8 J5.10 J7.2 J7.5 J7.6 J7.7 J7.8 J7.9 J7.10 SD.0 SD.1 SD.8 SD.9 U2.2 U2.9 U2.10 U2.15 USB1. USB1.2 USB1.3 USB1.MH1 USB1.MH2 USB2. USB2.MH1 USB2.MH2 Y1.0 Y2.0

## Polygon pours and split planes (outlines as drawn)
PGND on Top Layer "Mechanical 1-No Net" (solid, pour order 10): 995,3340 995,3220 1000,3225 1475,3225 1490,3225 1565,3150 1560,3145 1560,2910 2545,2910 2550,2905 2560,2895 2560,2775 3025,2775 3030,2780 3030,2880 3030,2890 3035,2885 4125,2885 4125,3330 4130,3335
DGND on Top Layer "Mechanical 1-No Net" (solid, pour order 21): 965,3210 965,1000 975,990 990,975 4140,975 4140,1605 3015,1605 3015,2115 3020,2120 3010,2130 2715,2130 2715,2510 2730,2525 2745,2540 2930,2540 2935,2540 2950,2555 2955,2560 3030,2560 3030,2745 3025,2750 3015,2760 2550,2760 2550,2880 2545,2885 2540,2890 1545,2890 1545,3145 1530,3160 1480,3210 1395,3210 975,3210 970,3205
AGND on Top Layer "Mechanical 1-No Net" (solid, pour order 27): 3030,2870 3030,2550 3040,2540 3020,2520 2835,2520 2820,2520 2730,2430 2765,2395 2765,2150 3000,2150 3025,2125 3030,2120 3030,1625 4155,1625 4125,1655 4125,2870
PGND on Bottom Layer "Mechanical 1-No Net" (solid, pour order 6): 995,3335 995,3225 1490,3225 1520,3195 1560,3155 1560,2910 2540,2910 2560,2890 2560,2775 3025,2775 3030,2780 3030,2885 4125,2885 4140,2900 4125,2915 4125,3340
DGND on Bottom Layer "Mechanical 1-No Net" (solid, pour order 23): 970,3210 960,3200 960,1005 990,975 4145,975 4145,1605 4140,1610 3015,1610 3015,2120 3010,2125 3005,2130 2710,2130 2710,2520 2725,2535 2730,2540 2945,2540 2945,2545 2960,2560 3020,2560 3020,2745 3025,2750 3015,2760 2555,2760 2555,2875 2540,2890 1550,2890 1550,3140 1480,3210 965,3210
AGND on Bottom Layer "Mechanical 1-No Net" (solid, pour order 25): 3035,2870 3035,2550 3045,2540 3025,2520 2830,2520 2760,2450 2740,2430 2740,2140 3005,2140 3035,2110 3035,1625 4155,1625 4130,1650 4130,2875

## Keep-outs
Keep-Out Layer:
  lines w3.94: 945,980 955,970 960,965 4160,965 4165,970 4165,3335 4150,3350 965,3350 945,3330 945,980

## Other copper
Top Layer:
  rectangle net 3.3V: 1910,2015 2110,2205
  rectangle net 1.8V: 2480,2165 2550,2195
  rectangle net 3.3V: 2090,1190 2285,1350

## Silkscreen, mask and mechanical layers (free items; w line width, h text height)
Top Overlay:
  text "by liumin yhzj" at 3455,1395 h100